# EAGLE board Grove+-+Mini+I2C+Motor+Driver+v1 (EAGLE 9.7.0)
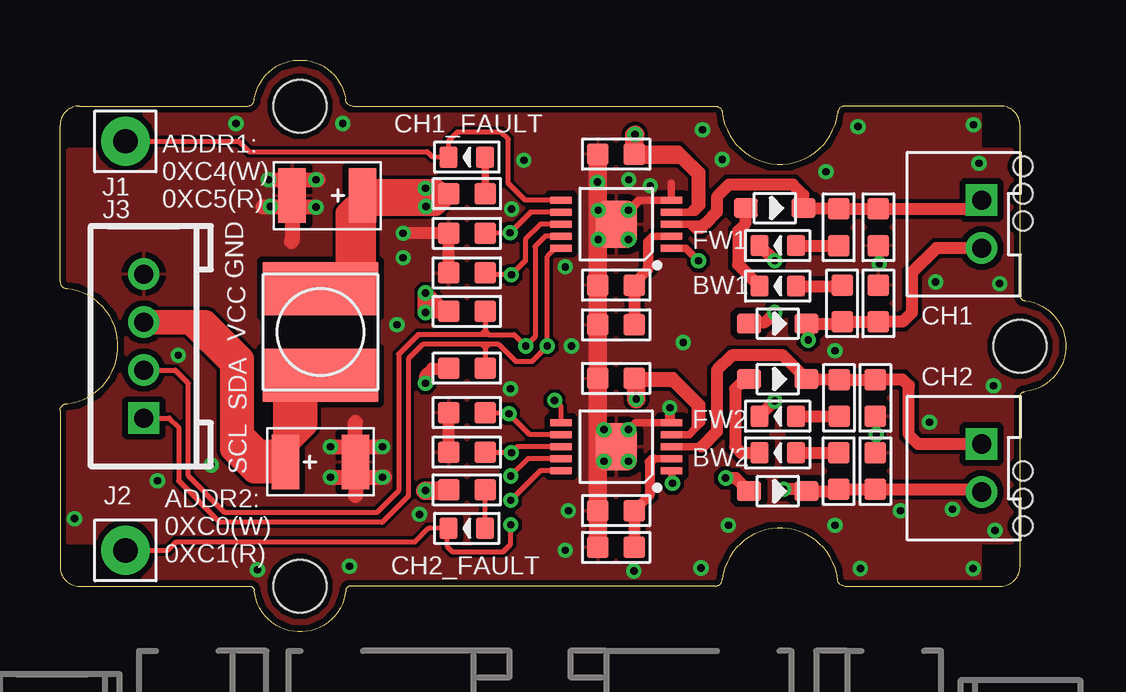
[diagram p0: board, top side]
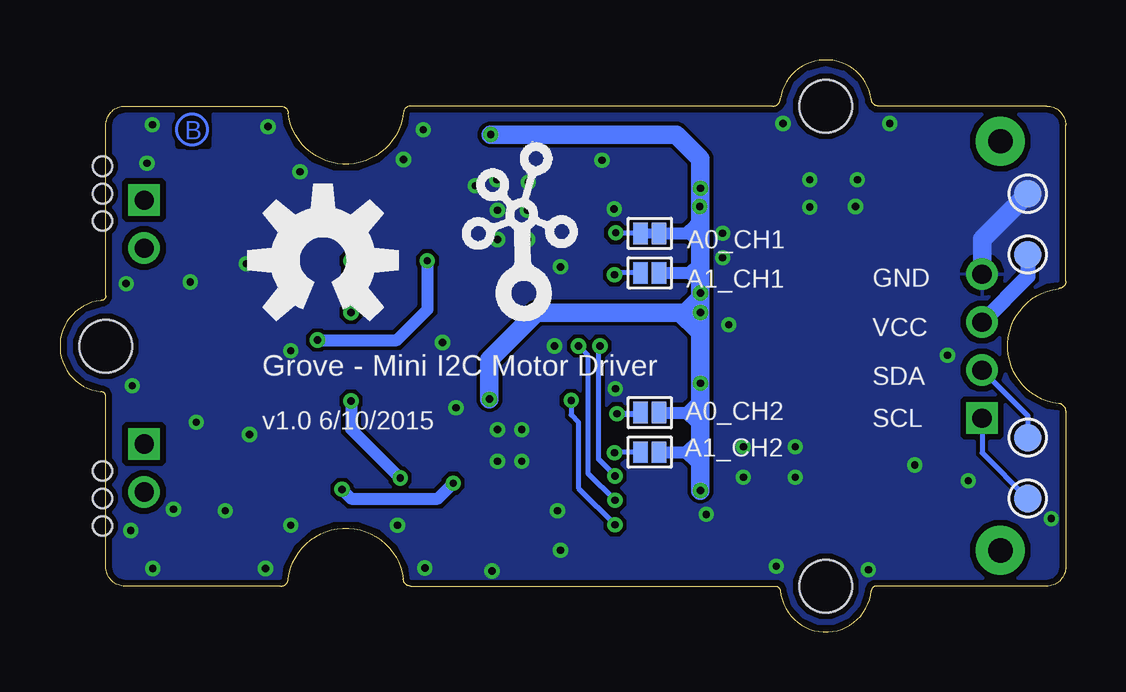
[diagram p1: board, bottom side, seen from below]

Size 41.91 x 23.83 mm. Coordinates in mm from the lower left corner, seen from the top.
Copper layers (1*16): Top / Bottom
Stack-up Default Layer Stack: Top User Defined 0.035mm / Dielectric-1 User Defined 1.5mm / Bottom User Defined 0.035mm
Design rules "SeeedStudio_2layer_DRU_no_angle_20140221 *": minimum track width 6mil, minimum drill 10mil, track to track 6mil, track to pad 10mil, pad to pad 10mil, via to via 6mil, smd to smd 0mil, copper to edge 10mil, drill to drill 10mil, minimum pad ring 10mil, minimum via ring 6mil, stop-mask expansion 2mil, vias tented up to drill 25mil, thermal gap 10mil
Holes 0.8 mm at -40.13,19.4 -40.13,17.12 -40.13,18.26 -40.13,6.7 -40.13,4.42 -40.13,5.56 -40.13,-6.63 -40.13,-8.92 -40.13,-7.78 -40.13,-19.33 -40.13,-21.62 -40.13,-20.48 -40.13,-32.67 -40.13,-34.95 -40.13,-33.81 -40.13,-45.37 -40.13,-47.65 -40.13,-46.51 -40.13,-58.7 -40.13,-60.99 -40.13,-59.85 -40.13,-71.4 -40.13,-73.69 -40.13,-72.55 -40.13,-84.74 -40.13,-87.02 -40.13,-85.88 -40.13,-97.44 -40.13,-99.72 -40.13,-98.58 40.13,17.12 40.13,19.4 40.13,18.26 40.13,4.42 40.13,6.7 40.13,5.56 40.13,-8.92 40.13,-6.63 40.13,-7.78 40.13,-21.62 40.13,-19.33 40.13,-20.48 40.13,-34.95 40.13,-32.67 40.13,-33.81 40.13,-47.65 40.13,-45.37 40.13,-46.51 40.13,-60.99 40.13,-58.7 40.13,-59.85 40.13,-73.69 40.13,-71.4 40.13,-72.55 40.13,-87.02 40.13,-84.74 40.13,-85.88 40.13,-99.72 40.13,-97.44 40.13,-98.58
Holes 1.91 mm at -46.04,-101.76 46.03,-101.76 46.03,21.43 -46.04,21.43

## Footprints (pad centres in the part's own frame; a part is rotated, then mirrored left to right if it is on the bottom)
2P-SMD-SHORT = smd 0.889 x 0.61: 1 0,0.381; 2 0,-0.381
JUMPER-2P = smd 0.889 x 0.61: 1 0,0.381; 2 0,-0.381
C0603 = smd 0.889 x 0.889: 1 0,0.762; 2 0,-0.762
AVX-B = smd 1.143 x 2.286: + -1.46,0; - 1.46,0
H2-2.0-6X4.5MM = drill 0.8 pad 1.3 square: + -1,0.75 | drill 0.8 pad 1.3: - 1,0.75
LED-0603 = smd 0.762 x 0.889: + -0.762,0; - 0.762,0
SOD-323 = smd 1 x 0.8: + -1.2,0; - 1.2,0
TP-D45MIL = smd 1.143 x 1.143: T 0,0
1P-80/40MIL = drill 1.016 pad 2.032: 1 0,0
HW4-2.0 = drill 0.8 pad 1.27 square: 1 -3,0 | drill 0.8 pad 1.27: 2 -1,0; 3 1,0; 4 3,0
INT2-SMD-4.8X4.8X3MM = smd 2.2 x 4.8: 1 -1.8,0; 2 1.8,0
R0603 = smd 0.889 x 0.889: 1 0,0.762; 2 0,-0.762
MSOP10-0.5-3X3MM = smd 0.305 x 0.889: 1 -1,-2.3; 2 -0.5,-2.3; 3 0,-2.3; 4 0.5,-2.3; 5 1,-2.3; 6 1,2.3; 7 0.5,2.3; 8 0,2.3; 9 -0.5,2.3; 10 -1,2.3 | smd 2 x 1.73: P$1 0,0
GROVE-1*2-TEST-PLATFORM = hole 2.2: -10,-10; -10,10; 20,0
GROVE-TEST-PLATFORM = hole 2.2: -10,-10; -10,10; 20,0

## Placement (x,y rotation side)
A0_CH1  DNP  [2P-SMD-SHORT]  17.33,16.61 90 bottom
A0_CH2  DNP  [JUMPER-2P]  17.33,9.14 90 bottom
A1_CH1  DNP  [JUMPER-2P]  17.33,14.96 90 bottom
A1_CH2  DNP  [JUMPER-2P]  17.33,7.49 90 bottom
C1  100nF  [C0603]  23.18,19.91 270 top
C2  100nF  [C0603]  23.18,10.56 270 top
C3  220uF  [AVX-B]  10.86,7.08 0 top
C4  220uF  [AVX-B]  11.14,18.18 180 top
C5  100nF  [C0603]  33.97,9.75 0 top
C6  100nF  [C0603]  33.97,6.7 180 top
C7  100nF  [C0603]  34.1,16.86 0 top
C8  100nF  [C0603]  34.1,13.69 180 top
CH1  320110049  [H2-2.0-6X4.5MM]  37.65,16.99 270 top
CH1_FAULT  RED  [LED-0603]  16.95,19.78 180 top
CH2  320110049  [H2-2.0-6X4.5MM]  37.65,6.83 270 top
CH2_FAULT  RED  [LED-0603]  16.95,4.31 180 top
D1  IN4148  [SOD-323]  29.91,12.85 0 top
D2  IN4148  [SOD-323]  29.78,17.66 0 top
D3  IN4148  [SOD-323]  29.91,5.86 0 top
D4  IN4148  [SOD-323]  29.91,10.54 0 top
D5  BLUE  [LED-0603]  29.91,16.1 180 top
D6  RED  [LED-0603]  29.91,14.41 180 top
D7  BLUE  [LED-0603]  29.91,8.99 180 top
D8  RED  [LED-0603]  29.91,7.46 180 top
GND  DNP  [TP-D45MIL]  1.59,18.26 0 bottom
J1  [1P-80/40MIL]  2.73,20.44 0 top
J2  [1P-80/40MIL]  2.73,3.4 0 top
J3  [HW4-2.0]  3.49,11.91 90 top
L1  220uH  [INT2-SMD-4.8X4.8X3MM]  10.86,12.49 90 top
R1  10K  [R0603]  16.95,10.99 270 top
R2  10K  [R0603]  16.95,13.36 270 top
R3  10K  [R0603]  16.95,16.61 90 top
R4  10K  [R0603]  16.95,14.96 90 top
R5  1R/1%  [R0603]  23.18,14.45 90 top
R6  DNP  [R0603]  23.18,12.8 90 top
R7  10K  [R0603]  16.95,18.26 270 top
R8  510R  [R0603]  32.45,16.86 180 top
R9  510R  [R0603]  32.59,13.69 180 top
R10  10K  [R0603]  16.95,9.14 90 top
R11  10K  [R0603]  16.95,7.49 90 top
R12  1R/1%  [R0603]  23.18,5.05 90 top
R13  DNP  [R0603]  23.18,3.53 90 top
R14  10K  [R0603]  16.95,5.91 270 top
R15  510R  [R0603]  32.46,9.75 180 top
R16  510R  [R0603]  32.45,6.7 180 top
SCL  DNP  [TP-D45MIL]  1.59,5.56 0 bottom
SDA  DNP  [TP-D45MIL]  1.59,8.1 0 bottom
U1  DRV8830  [MSOP10-0.5-3X3MM]  23.18,16.99 90 top
U2  DRV8830  [MSOP10-0.5-3X3MM]  23.18,7.72 90 top
U3  [GROVE-1*2-TEST-PLATFORM]  20,11.91 0 top
U11  [GROVE-TEST-PLATFORM]  20,11.91 0 top
U$8  [OSHW_FILLX250_NOTEXT]  30.95,15.49 0 bottom
U$14  [GROVE-SILK-BIG]  22.64,13.91 0 bottom
VCC  DNP  [TP-D45MIL]  1.59,15.72 0 bottom

## Library data of the parts
A0_CH1 C1-C8 CH1_FAULT CH2_FAULT D1-D8 L1 R1-R16 = Discrete-new
A0_CH2 A1_CH1 A1_CH2 GND SCL SDA VCC = Discrete-new; PARTNO: DNP
CH1 CH2 J1-J3 = Connector-new
U1 U2 U11 = template
U3 = moudle-new
U$8 U$14 = Logo

## Nets
A0_U1: A0_CH1.1 R3.2 U1.7
A0_U2: A0_CH2.1 R10.2 U2.7
A1_U1: A1_CH1.1 R4.2 U1.8
A1_U2: A1_CH2.1 R11.2 U2.8
GND: C1.2 C2.2 C3.- C4.- C5.2 C6.2 C7.2 C8.2 GND.T J3.4 R3.1 R4.1 R5.1 R6.1 R10.1 R11.1 R12.1 R13.1 U1.5 U1.P$1 U2.5 U2.P$1
N$1: R5.2 R6.2 U1.2
N$2: R12.2 R13.2 U2.2
N$3: CH1_FAULT.- J1.1 U1.6
N$4: CH1_FAULT.+ R7.1
N$5: CH2_FAULT.- J2.1 U2.6
N$6: CH2_FAULT.+ R14.1
N$7: D1.+ D5.-
N$8: D6.+ R9.2
N$9: D2.+ D6.-
N$10: D5.+ R8.1
N$11: D3.+ D7.-
N$12: D7.+ R15.1
N$13: D4.+ D8.-
N$14: D8.+ R16.2
N$15: C3.+ J3.3 L1.1 VCC.T
OUT1_CH1: C7.1 CH1.+ D2.- R8.2 U1.3
OUT1_CH2: C5.1 CH2.+ D4.- R15.2 U2.3
OUT2_CH1: C8.1 CH1.- D1.- R9.1 U1.1
OUT2_CH2: C6.1 CH2.- D3.- R16.1 U2.1
SCL: J3.1 R1.1 SCL.T U1.10 U2.10
SDA: J3.2 R2.1 SDA.T U1.9 U2.9
VCC: A0_CH1.2 A0_CH2.2 A1_CH1.2 A1_CH2.2 C1.1 C2.1 C4.+ L1.2 R1.2 R2.2 R7.2 R14.2 U1.4 U2.4

## Tracks (layer width: path | path; a pad name or v marks a point on that pad's centre or on a via)
A0_U1  (via drill 0.3 pad 0.64)
  Top 0.203: A0_CH1.1 17.74,16.63 v18.75,16.63 19.61,17.49 U1.7
  Bottom 0.203: A0_CH1.1 18.73,16.61 v18.75,16.63
A0_U2  (via drill 0.3 pad 0.64)
  Top 0.203: A0_CH2.1 18.65,9.14 v18.7,9.09 19.58,8.22 U2.7
  Bottom 0.254: v18.7,9.09 17.77,9.09 A0_CH2.1
A1_U1  (via drill 0.3 pad 0.64)
  Top 0.203: R4.2 17.77,14.91 18.78,14.91 v18.81,14.88 19.39,15.46 19.39,16.35 20.02,16.99 U1.8
  Bottom 0.203: R4.2 18.73,14.96 v18.81,14.88
A1_U2  (via drill 0.3 pad 0.64)
  Top 0.203: A1_CH2.1 18.78,7.49 v18.81,7.46 19.06,7.72 U2.8
  Bottom 0.203: A1_CH2.1 18.78,7.49 v18.81,7.46
GND  (via drill 0.3 pad 0.64)
  Top 0.305: 24.18,17.99 U1.5 25.46,18 25.46,18.69 | 24.18,17.99 U1.P$1 | 25.29,8.72 U2.5 25.48,9.28 v25.41,9.34 | 25.29,8.72 23.97,8.72 v23.68,8.43 | 24.18,17.99 24.1,17.99 v23.68,17.57 | 25.29,8.72 25.36,8.79 25.36,9.24
  Top 0.508: R11.1 R10.1 | R4.1 R3.1 v14.3,16.61
  Top 0.635: v11.27,7.72 12.3,7.72 | 12.3,7.72 13.4,7.72 | v11.27,6.45 13.52,6.45 | v8.68,18.84 10.75,18.84 | v10.67,17.7 8.47,17.7 | 12.3,7.72 12.3,8.73 | C3.- 12.32,5.7 12.3,5.69 | C4.- 9.67,16.32 9.64,16.28
  Top 0.762: 22.41,16.23 R5.1 R6.1 C2.2 R12.1 R13.1 | 22.41,16.23 U1.P$1 | C1.2 22.41,16.23
  Bottom 0.762: GND.T 3.49,16.35 J3.4
  other vias: 24.6,18.59 22.43,17.57 22.43,16.35 23.68,16.35 22.67,8.43 22.67,7.11 23.68,7.11 38.29,19.53 23.91,2.54 38.06,21.13 0.61,4.72 8.23,2.59 12.06,2.74 11.78,21.18 22.4,18.74 23.7,18.84 19.33,19.66 18.82,17.62 14.3,15.59 14.98,4.9 4.06,6.29 33.35,2.64 38.05,2.64 7.34,21.18 6.3,6.96 10.67,18.84 8.76,17.72 26.77,20.93 33.25,21.05 34.14,15.34 34.01,8.23 4.93,11.53 13.43,7.72 13.43,6.45 18.77,10.13 21.18,5.05 21.05,3.4 21.31,11.91 21.05,15.21 25.97,12.06 32.29,11.72 36.48,14.58 39.15,14.51 38.9,10.26 36.23,8.73 38.96,4.22 37.18,5.11 35.02,5.05 14.04,12.8 26.71,2.66 27.85,4.44 32.29,4.44 27.59,19.68 31.91,19.17
  pour Bottom: 41.79,25.07 -2.17,25.07 -2.17,0.15 41.79,0.15
  pour Top: 41.79,25.32 -2.17,25.32 -2.17,0.02 41.79,0.02
N$1
  Top 0.305: U1.2 24.71,16.49 | 24.71,16.49 24.57,16.35 24.57,15.08 R5.2 | 24.71,16.49 24.68,16.49 24.45,16.25 24.45,15.13 24.04,14.73
  Top 0.508: R5.2 R6.2
N$2
  Top 0.305: 24.55,5.66 R12.2 | U2.2 24.71,7.22 24.7,7.21
  Top 0.406: 24.7,7.21 24.57,7.08 24.57,5.69 R12.2
  Top 0.508: R12.2 R13.2
N$3
  Top 0.203: U1.6 19.38,17.99 18.68,18.69 18.68,20.52 18.37,20.82 16.55,20.82 16.19,20.47 CH1_FAULT.- 16.16,19.81 15.5,19.81 15.3,20.01 7.88,20.01 7.45,20.44 J1.1
N$4
  Top 0.305: R7.1 CH1_FAULT.+
N$5  (via drill 0.3 pad 0.64)
  Top 0.203: U2.6 20.88,9.38 v20.61,9.65 | v18.78,4.47 18.78,3.65 18.48,3.35 16.34,3.35 16.14,3.55 16.14,4.26 CH2_FAULT.- 15.35,4.31 14.79,3.76 4.84,3.76 4.48,3.4 J2.1
  Bottom 0.203: v20.61,9.65 20.61,9.04 20.3,8.73 20.3,5.99 v18.78,4.47
N$6
  Top 0.203: CH2_FAULT.+ R14.1
N$7  (via drill 0.3 pad 0.64)
  Top 0.508: D1.+ 28.76,12.91 29.38,12.91 v29.78,13.31 | v29.78,15.46 D5.-
  Bottom 0.508: v29.78,15.46 v29.78,13.31
N$8
  Top 0.508: D6.+ 32.55,14.41 R9.2
N$9
  Top 0.508: 28.55,17.66 28.42,17.66 | D2.+ 28.55,17.66 | 28.55,17.66 28.55,16.99 28.25,16.7 28.25,15.3 D6.-
N$10
  Top 0.508: D5.+ R8.1
N$11  (via drill 0.3 pad 0.64)
  Top 0.508: D7.- v29.78,9.62 | D3.+ 28.16,6.41 v27.73,6.41
  Bottom 0.508: v29.78,9.62 29.78,8.45 v27.73,6.41
N$12
  Top 0.508: D7.+ R15.1
N$13
  Top 0.508: D4.+ 28.53,10.54 28.13,10.13 28.13,7.72 28.38,7.46 D8.-
N$14
  Top 0.508: D8.+ R16.2
N$15
  Top 1.016: 5.44,12.91 6.05,12.91 7.58,11.38 7.58,8.23 | 7.58,8.23 7.58,7.72 8.29,7.01 9.32,7.01 C3.+ 9.4,7.81 | 9.4,7.81 9.4,10.88 | 9.4,10.88 9.31,10.97 | 9.4,10.88 10.67,10.88 L1.1 | 9.4,7.81 10.22,8.63 10.22,10.36 10.32,10.46 | J3.3 5.44,12.91 | 5.44,12.91 7.17,11.17 7.17,7.62 8.09,6.7 9.2,6.7 9.31,6.6 | 9.4,7.81 9.1,7.51 8.29,7.51 7.58,8.23
  Bottom 0.635: VCC.T 1.59,14.81 J3.3
OUT1_CH1
  Top 0.305: 26.22,16.99 26.86,16.99 | U1.3 26.22,16.99 | 26.22,16.99 26.48,16.73 26.73,16.73 26.86,16.86
  Top 0.508: 38.29,17.88 CH1.+ 38.04,17.62 C7.1 R8.2 32.41,17.66 D2.- 30.98,18.2 30.54,18.64 27.87,18.64 27.37,18.13 27.37,17.5 26.86,16.99
OUT1_CH2
  Top 0.305: U2.3 26.73,7.72
  Top 0.508: CH2.+ 35.76,7.83 35.37,8.23 35.37,10.26 35.11,10.51 C5.1 R15.2 32.43,10.54 D4.- 30.98,10.66 30.98,10.67 30.12,11.53 28,11.53 27.37,10.89 27.37,8.35 26.73,7.72
OUT2_CH1  (via drill 0.3 pad 0.64)
  Top 0.305: U1.1 26.08,15.99 v26.6,15.46
  Top 0.508: v31.18,12.16 31.18,12.66 31.05,12.79 D1.- 32.51,12.85 R9.1 C8.1 35.11,12.92 35.49,13.31 35.49,14.96 36.53,15.99 CH1.-
  Bottom 0.508: v31.18,12.16 27.87,12.16 26.6,13.43 v26.6,15.46
OUT2_CH2  (via drill 0.3 pad 0.64)
  Top 0.305: 25.45,6.72 U2.1 25.49,6.7 25.49,6.23 v25.52,6.19
  Top 0.508: CH2.- 38.29,5.94 C6.1 R16.1 32.37,5.86 D3.- 30.85,5.86 30.78,5.94 v30.16,5.94
  Bottom 0.508: v25.52,6.19 26.16,5.56 29.78,5.56 v30.16,5.94
SCL  (via drill 0.3 pad 0.64)
  Top 0.203: 17.87,11.98 18.27,11.98 18.98,11.27 19.67,11.27 v20.3,11.91 20.3,15.64 20.65,15.99 U1.10 | 17.87,11.98 17.56,11.98 | U2.10 20.02,6.72 v18.78,5.48 | 17.71,11.83 17.56,11.98 | 17.71,11.83 17.87,11.98 | 17.71,11.83 R1.1 | J3.1 4.56,8.91 4.94,8.53 4.94,6.3 6.66,4.57 13.42,4.57 14.51,5.66 14.51,11.38 15.12,11.98 17.56,11.98
  Bottom 0.203: J3.1 3.49,7.46 SCL.T | v18.78,5.48 19.9,6.6 19.9,11.5 v20.3,11.91
SDA  (via drill 0.3 pad 0.64)
  Top 0.203: 17.87,12.39 17.77,12.39 | 17.77,12.39 17.56,12.39 | U2.9 19.5,7.22 v18.78,6.5 | R2.1 17.71,12.54 | 17.71,12.54 17.71,12.44 17.77,12.39 | 17.71,12.54 17.56,12.39 | 17.71,12.54 17.87,12.39 | 17.87,12.39 18.92,12.39 v19.4,11.91 19.8,12.3 19.8,16.07 20.22,16.49 U1.9 | J3.2 4.8,10.91 5.34,10.36 5.34,6.5 6.87,4.97 13.19,4.97 14.11,5.89 14.11,11.58 14.92,12.39 17.56,12.39
  Bottom 0.203: J3.2 1.59,9 SDA.T | v18.78,6.5 19.47,7.18 19.47,11.85 v19.4,11.91
VCC  (via drill 0.3 pad 0.64)
  Top 0.305: U2.4 26.21,8.22 26.48,8.48 | C2.1 24.09,10.56 24.29,10.36 25.51,10.36 26.48,9.39 26.48,8.48 | 23.86,19.66 25.84,19.66 26.48,19.02 26.48,17.75 26.21,17.49 U1.4 26.47,17.49 26.73,17.75 26.73,19.17 25.99,19.91 | 25.99,19.91 C1.1 | 25.99,19.91 25.79,20.11 24.17,20.11 24.06,20.01 | 26.48,8.48 26.73,8.73 26.73,9.5 25.71,10.51 | 25.71,10.51 23.94,10.51 | 25.71,10.51 25.56,10.66 23.84,10.66
  Top 0.508: R2.2 16.19,13.31 v15.23,13.31 | 16.19,10.97 R1.2 16.16,10.97 15.5,10.97 15.23,10.69 v15.23,10.36
  Top 0.635: v15.23,13.31 15.23,14.02 | 15.23,14.02 v15.23,14.12 | 15.23,14.02 15.33,14.02 | 15.33,14.02 15.94,13.41 | 15.33,14.02 15.33,13.81 | R2.2 15.35,13.36
  Top 0.762: R14.2 16.19,5.89 v15.23,5.89 | C1.1 23.94,20.7 v23.96,20.72 | v24.01,9.7 24.01,10.49 C2.1 | v15.23,18.49 13.09,18.49 12.79,18.18 C4.+ | 12.91,17.83 13.02,17.73 v15.25,17.73 15.66,17.73 R7.2 16.16,18.28 15.43,18.28 v15.23,18.49 | C4.+ 12.51,18.18 | 11.75,14.45 11.87,14.58 11.87,17.46 C4.+ | v15.23,18.49 15.71,18.49 16.01,18.18
  Top 1.016: C4.+ 12.66,18.12 12.66,14.42 | L1.2 11.59,14.29 11.75,14.45
  Bottom 0.508: A0_CH2.2 15.81,9.14 | 15.78,9.14 15.53,9.14 15.23,9.44 | A1_CH2.2 15.83,7.49 | 15.83,7.49 15.25,7.49 | A1_CH1.2 15.68,14.96 | 15.68,14.96 15.35,14.96 15.23,14.83 | A0_CH1.2 15.81,16.61 | 15.68,16.61 15.28,16.61 15.23,16.56 | v15.23,14.12 15.99,13.36 R2.2 | 15.81,9.14 15.78,9.14 | 15.78,9.14 15.3,9.62 | 15.81,9.14 15.4,8.73 15.3,8.73 | 15.83,7.49 15.34,7.97 15.3,7.97 | 15.83,7.49 15.42,7.08 15.3,7.08 | 15.81,16.61 15.43,16.99 15.3,16.99 | 15.81,16.61 15.68,16.61 | 15.68,16.61 15.17,16.1 | 15.68,14.96 15.3,15.34 | 15.68,14.96 15.43,14.7
  Bottom 0.762: v15.23,5.89 15.23,7.51 | 15.23,7.51 15.23,9.44 v15.23,10.36 v15.23,14.12 | v15.23,14.12 v15.23,13.31 16.06,13.31 | v15.23,14.12 15.23,14.83 15.23,16.56 v15.23,18.49 15.23,19.71 16.24,20.72 v23.96,20.72 | 15.25,7.49 15.23,7.51 | 16.06,13.31 22.06,13.31 24.01,11.35 v24.01,9.7 | 16.06,13.31 15.3,12.54
(copper drawn outside any net)
  shapes: Bottom circle x1, Top area x1

## Text on the board
Bottom: B
tPlace: CH1_FAULT | ADDR1: / 0XC4(W) / 0XC5(R) | FW1 | GND | BW1 | CH1 | VCC | CH2 | SDA | FW2 | SCL | BW2 | ADDR2: / 0XC0(W) / 0XC1(R) | CH2_FAULT
bPlace: Grove - Mini I2C Motor Driver | v1.0 6/10/2015